# Altium PCB PCB1.PcbDoc
Units mm, origin at the board's own origin, x right, y up, seen from the top; angles counter-clockwise.
Board outline 152.4 x 101.6 mm, 2 copper layers (Top Layer, Bottom Layer); 44 components, 51 nets, 204 pads, 0 vias.
Unrouted connection lines stored in the file: 2.
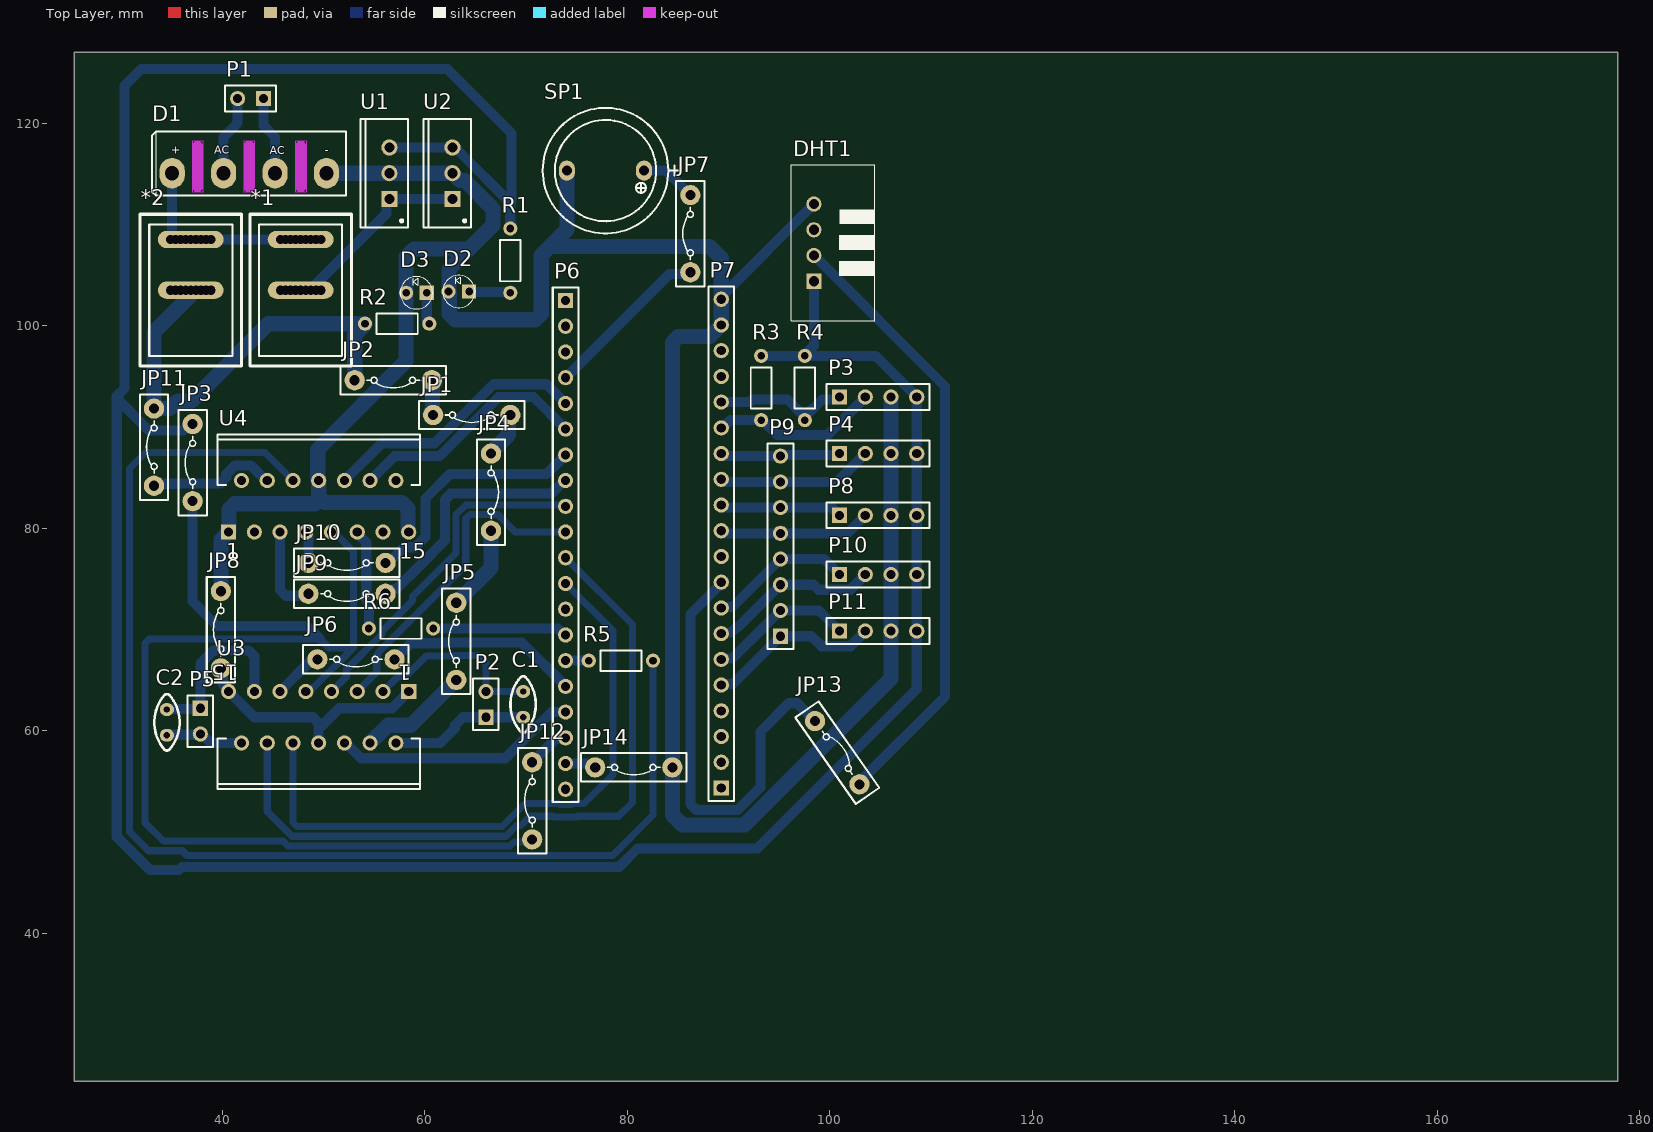
[diagram p0: Top Layer view]
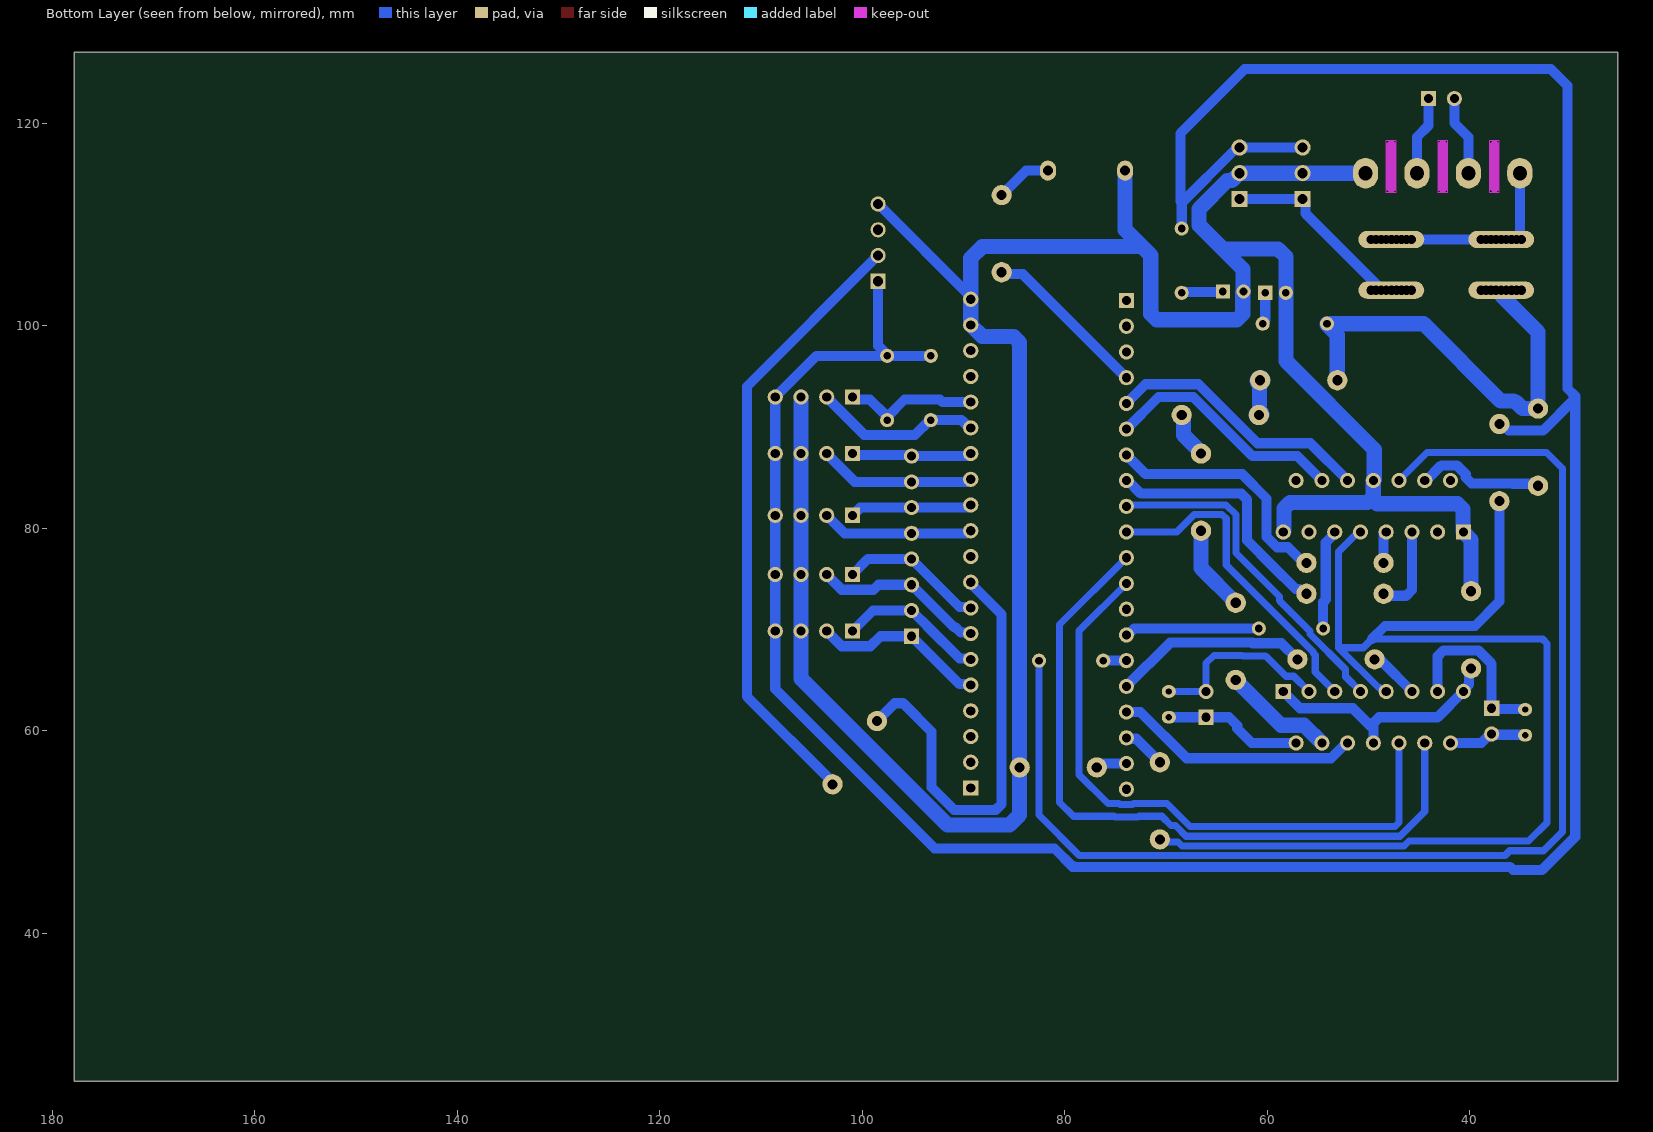
[diagram p1: Bottom Layer view, seen from below]
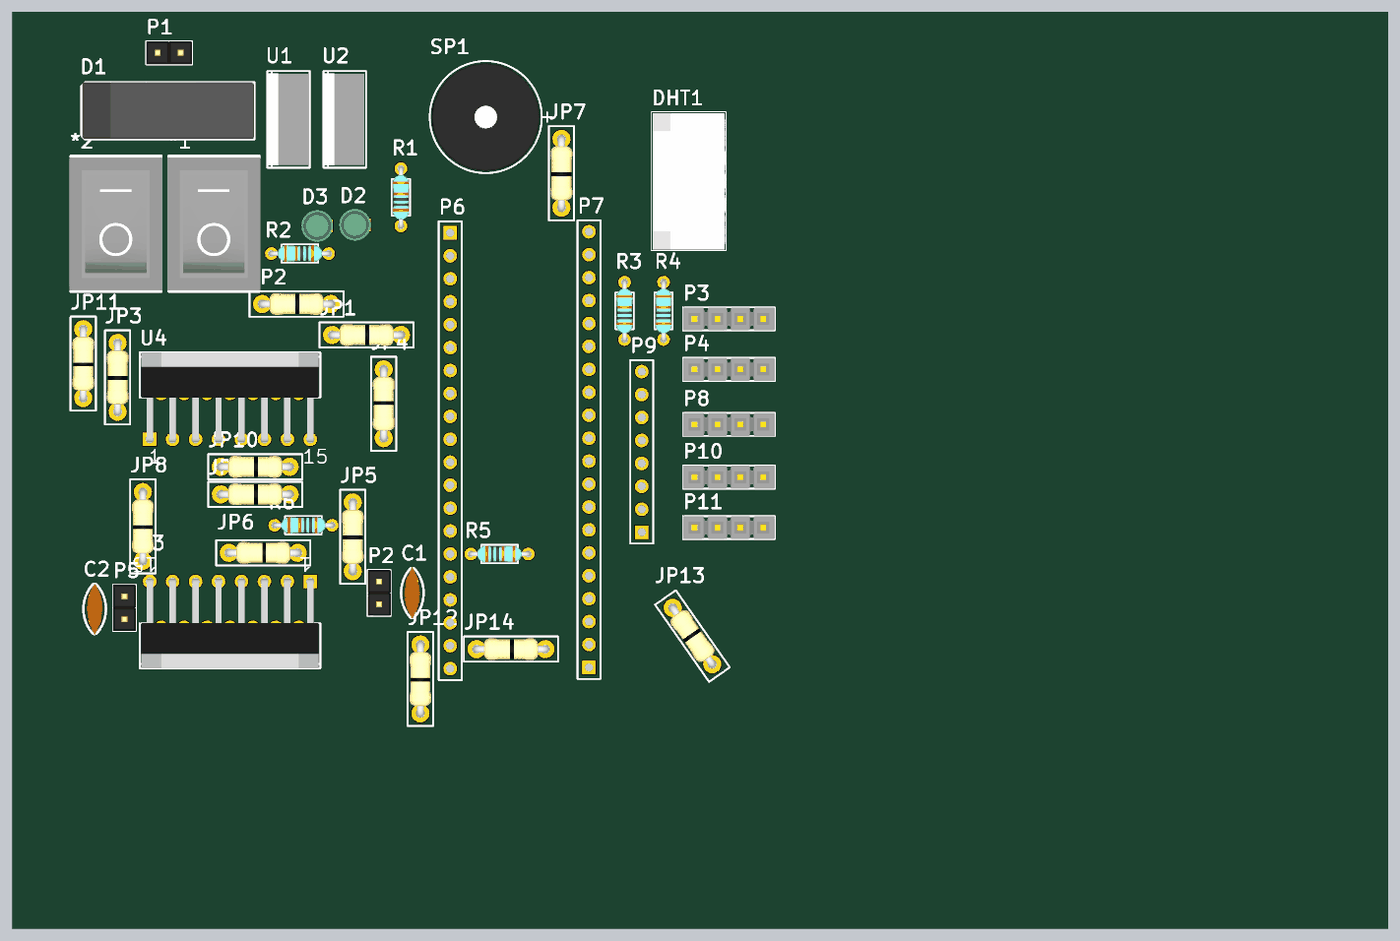
[diagram p2: 3D render of the assembled board from above, using the file's embedded part models]

## Layer stack, top to bottom
Top Solder: solder mask 0.0102, Solder Resist, Dk 3.5
Top Layer: signal copper 0.0356
Dielectric 1: dielectric 0.32, FR-4, Dk 4.8
Bottom Layer: signal copper 0.0356
Bottom Solder: solder mask 0.0102, Solder Resist, Dk 3.5

## Board outline
25.4,25.4 177.8,25.4 177.8,127 25.4,127

## Design rules (kind name [scope] priority, off if disabled: settings)
Clearance [All] p1: gap=0.254 ignorepadtopadclearanceinfootprint=FALSE except(0: Arc-Hole Track-Hole SMDPad-Hole THPad-Hole Via-Hole Fill-Hole Poly-Hole Region-Hole Text-Hole)
PolygonConnect [All] p1: connectstyle=Relief reliefconductorwidth=0.254 reliefentries=4 polygonreliefangle="90 Angle" airgapwidth=0.254
RoutingVias [All] p1: holewidth=0.711 width=1.27 viastyle="Through Hole" minholewidth=0.711 minwidth=1.27 maxholewidth=0.711 maxwidth=1.27
SolderMaskExpansion [All] p1: expansion=0.102 istentingtop=FALSE
Width [All] p1: maxlimit=5 minlimit=0.254 preferedwidth=1
30 further rules are at their usual default settings.

## Components (designator, comment, footprint, x,y, rotation, side; value= is the part's Value field where it differs from the comment)
*1 "Racker" "Racker 2 Pin" 47.752,103.508 r0 top
*2 "Racker" "Racker 2 Pin" 36.9,103.508 r0 top
C1 "100nF" Cap-100nF 69.723,62.611 r270 top
C2 "100nF" Cap-100nF 34.544,60.833 r90 top
D1 "Diode Bridge" "Bridge KBL PACKAGE" 42.68,115.062 r0 top
D2 "LED3MM" LED3mm_GRN 63.373,103.378 r180 top
D3 "LED3MM" LED3mm_GRN 59.182,103.251 r180 top
DHT1 "DHT22" DHT22 98.425,104.394 r90 top
JP1 "Jumper" Jumper 64.643,91.186 r180 top
JP2 "Jumper" Jumper 56.896,94.615 r180 top
JP3 "Jumper" Jumper 37.084,86.487 r90 top
JP4 "Jumper" Jumper 66.548,83.566 r270 top
JP5 "Jumper" Jumper 63.119,68.834 r90 top
JP6 "Jumper" Jumper 53.213,67.056 r180 top
JP7 "Jumper" Jumper 86.233,109.093 r90 top
JP8 "Jumper" Jumper 39.878,69.977 r90 top
JP9 "Jumper" Jumper 52.324,73.533 r180 top
JP10 "Jumper" Jumper 52.324,76.581 r180 top
JP11 "Jumper" Jumper 33.274,88.011 r90 top
JP12 "Jumper" Jumper 70.612,53.086 r90 top
JP13 "Jumper" Jumper 100.737,57.839 r305 top
JP14 "Jumper" Jumper 80.645,56.388 r180 top
P1 "Header 2" HDR1X2 44.069,122.428 r180 top
P2 "Header 2" HDR1X2 66.04,61.341 r90 top
P3 "Header 4" HDR1X4 100.965,92.964 r0 top
P4 "Header 4" HDR1X4 100.965,87.376 r0 top
P5 "Header 2" HDR1X2 37.846,62.23 r270 top
P6 "Header 20" HDR1X20 73.914,102.489 r270 top
P7 "Header 20" HDR1X20 89.281,54.356 r90 top
P8 "Header 4" HDR1X4 100.965,81.28 r0 top
P9 "Header 8" HDR1X8 95.123,69.342 r90 top
P10 "Header 4" HDR1X4 100.965,75.438 r0 top
P11 "Header 4" HDR1X4 100.965,69.85 r0 top
R1 "1K" RES-(1/4) 68.453,106.426 r90 top
R2 "1K" RES-(1/4) 57.277,100.203 r180 top
R3 "1K" RES-(1/4) 93.218,93.853 r90 top
R4 "1K" RES-(1/4) 97.536,93.853 r90 top
R5 "1K" RES-(1/4) 79.375,66.929 r0 top
R6 "1K" RES-(1/4) 57.658,70.104 r180 top
SP1 "" "BUZZER 7.62mm DC" 77.851,115.316 r180 top
U1 "L7805CV" "TO-220 AB" 56.515,115.062 r90 top
U2 "L7805CV" "TO-220 AB" 62.738,115.062 r90 top
U3 "L298N" Multiwatt15V 49.53,61.341 r180 top
U4 "L298N" Multiwatt15V 49.53,82.169 r0 top

## Footprints (in the part's own frame and the unit in brackets; to place one, negate y for a bottom-side part, rotate by r counter-clockwise, add the part's x,y. Pads: shape width x height; smd on the part's side, far side on the other; paste and mask are expansions set on the pad)
"Bridge KBL PACKAGE" [mm] "KBL Bridge Rectifiers DESIGNER :ABBAS BASEREH"
  oval 2.5x3 hole 1.4: 1(-7.62,0) 2(-2.54,0) 3(2.54,0) 4(7.62,0)
  Keep-Out Layer board cut-out: -5.6,3.2 -4.6,3.2 -4.6,-1.9 -5.6,-1.9
  Keep-Out Layer board cut-out: -0.5,3.2 0.5,3.2 0.5,-1.9 -0.5,-1.9
  Keep-Out Layer board cut-out: 4.6,3.2 5.6,3.2 5.6,-1.9 4.6,-1.9
  Keep-Out Layer lines w1: -5.1,-1.425 -5.1,2.725 ; 0,-1.425 0,2.725 ; 5.075,-1.425 5.075,2.725
  silkscreen extent -9.61,-2.22 9.56,4.13, body extent -9.51,-2.12 9.49,4.13, height 16.05
"BUZZER 7.62mm DC" [mm] "BUZZER 12mm DIA , 7.62mm pitch DESIGNER ABBAS BASEREH"
  oval 1.6x2 hole 1: 1(-3.81,0) 2(3.81,0)
  silkscreen extent -7.3,-6.2 6.2,6.2, body extent -6,-6 6,6, height 9.5
Cap-100nF [mil] "Bipolar Capacitor-Design:Ali Hafizi"
  oval 50x55 hole 25: 1(-50,0) 2(50,0)
  silkscreen extent -110,-49 110,49, body extent -115,-34 115,33, height 272
DHT22 [mm] "Temperature & Humidity Sensor"
  rect 1.5x1.5 hole 1: 1(0,0)
  round 1.5 hole 1: 2(2.54,0) 3(5.08,0) 4(7.62,0)
  silkscreen extent -3.88,-6.05 11.51,2.23, body extent -3.73,-5.91 11.37,2.1, height 29.1
HDR1X2 [mm] "Connector; Header; 2 Position"
  rect 1.5x1.5 hole 0.9: 1(0,0)
  round 1.5 hole 0.9: 2(2.54,0)
  silkscreen extent -1.27,-1.27 3.81,1.27, body extent -1.27,-1.28 3.81,1.26, height 8.79
HDR1X4 [mm] "Connector; Header; 4 Position"
  rect 1.5x1.5 hole 0.9: 1(0,0)
  round 1.5 hole 0.9: 2(2.54,0) 3(5.08,0) 4(7.62,0)
  silkscreen extent -1.27,-1.27 8.89,1.27, body extent -1.27,-1.28 8.89,1.26, height 8.38
HDR1X8 [mm] "Connector; Header; 8 Position"
  rect 1.5x1.5 hole 0.9: 1(0,0)
  round 1.5 hole 0.9: 2(2.54,0) 3(5.08,0) 4(7.62,0) 5(10.16,0) 6(12.7,0) 7(15.24,0) 8(17.78,0)
  silkscreen extent -1.27,-1.27 19.05,1.27
HDR1X20 [mm] "Connector; Header; 20 Position"
  rect 1.5x1.5 hole 0.9: 1(0,0)
  round 1.5 hole 0.9: 2(2.54,0) 3(5.08,0) 4(7.62,0) 5(10.16,0) 6(12.7,0) 7(15.24,0) 8(17.78,0) 9(20.32,0) 10(22.86,0) 11(25.4,0) 12(27.94,0) 13(30.48,0) 14(33.02,0) 15(35.56,0) 16(38.1,0) 17(40.64,0) 18(43.18,0) 19(45.72,0) 20(48.26,0)
  silkscreen extent -1.27,-1.27 49.53,1.27
Jumper [mm]
  round 2 hole 1: 1(-3.81,0) 2(3.81,0)
  silkscreen extent -5.21,-1.4 5.21,1.4, body extent -4.21,-1.2 4.21,1.2, height 2.5
LED3mm_GRN [mil]
  rect 55x55 hole 30: 1(-40,0)
  round 55 hole 30: 2(40,0)
  silkscreen extent -63,-63 63,63, body extent -69,-69 69,69, height 154
Multiwatt15V [mm] "TO, Thru-Hole, Vertical, Heatsink Mounted; 15 Bent Staggered Leads; Pitch 1.27 mm"
  rect 1.5x1.5 hole 0.9: 1(-8.89,-2.54)
  round 1.5 hole 0.9: 2(-7.62,2.54) 3(-6.35,-2.54) 4(-5.08,2.54) 5(-3.81,-2.54) 6(-2.54,2.54) 7(-1.27,-2.54) 8(0,2.54) 9(1.27,-2.54) 10(2.54,2.54) 11(3.81,-2.54) 12(5.08,2.54) 13(6.35,-2.54) 14(7.62,2.54) 15(8.89,-2.54)
  silkscreen extent -10,2.09 10,7.09, body extent -9.8,-2.81 9.8,7.08, height 21.3
"Racker 2 Pin" [mm] "(www.Smartw.ir)"
  oval 2.5x1.7 hole 0.9: 1(-2,5) 1(-1.5,5) 1(-1,5) 1(-0.5,5) 1(0,5) 1(0.5,5) 1(1,5) 1(1.5,5) 1(2,5) 2(-2,0) 2(-1.5,0) 2(-1,0) 2(-0.5,0) 2(0,0) 2(0.5,0) 2(1,0) 2(1.5,0) 2(2,0)
  silkscreen extent -5,-7.5 5,7.5, body extent -5.17,-7.38 5.13,7.32, height 12.62
RES-(1/4) [mil]
  round 55 hole 30: 1(-125,0) 2(125,0)
  silkscreen extent -80,-40 80,40, body extent -135,-36 135,36, height 115
"TO-220 AB" [mm] "Epoxy meets UL94, V0-Design:Abbas Basereh"
  rect 1.6x1.6 hole 1: 1(-2.54,0)
  round 1.6 hole 1: 2(0,0) 3(2.54,0)
  silkscreen extent -5.35,-1.85 5.35,2.85, body extent -5.08,-1.65 5.08,2.92, height 18.54

## Part data
C1 C2: library part "CAP CERAMIC TOTAL SIZE", "CAP Ceramic Total", Designer="Ali Hafizi"
D1: library part "Diode Bridge TOTAL SIZE", "Full Wave Diode Bridge", ComponentLink1Description=Datasheet, ComponentLink2Description=Reference, Design Date=1395/11/09, Designer="Abbas Basereh", Mounting Technology="Surface Mount\Through-Hole", Status=Unreleased
D2 D3: library part "LED 3MM", "Light Emitting Diode", Designer="Ali Hafizi"
DHT1: "Digital Humidity & Temprature Sensor"
P1 P2 P5: "Header, 2-Pin", LatestRevisionDate=17-Jul-2002, LatestRevisionNote="Re-released for DXP Platform.", Publisher="Altium Limited"
P3 P4 P8 P10 P11: "Header, 4-Pin", LatestRevisionDate=17-Jul-2002, LatestRevisionNote="Re-released for DXP Platform.", Publisher="Altium Limited"
P6 P7: "Header, 20-Pin", LatestRevisionDate=17-Jul-2002, LatestRevisionNote="Re-released for DXP Platform.", Publisher="Altium Limited"
P9: "Header, 8-Pin", LatestRevisionDate=17-Jul-2002, LatestRevisionNote="Re-released for DXP Platform.", Publisher="Altium Limited"
R1 R2 R3 R4 R5 R6: library part "RES DIP PACKAGE", "TOTAL DIP RESISTOR PACK", Designer="Ali Hafizi"
SP1: library part "PIEZO BUZZER", "PIEZO BUZZER ACTIVE", Comment_1="SPEAKER AND BEEP", ComponentLink2Description=Reference, Design Date=1395/11/14, Designer="Abbas Basereh", Mounting Technology=THD, PackageDescription=THD, Pin Count=2, Publisher="Abbas Basereh", Status=Unreleased
U1 U2: library part "L7805CV-Linear Voltage Regulator IC Positive 1 Output 5V 1.5A TO-220AB", "Linear Voltage Regulator IC Positive FIXED", Manufacturer=STMicroelectronics, Designer="Abbas Basereh", Link=https://www.aliexpress.com/item/, Part. No=L7805CV
U3 U4: "Dual Full Bridge Driver", Package Information="Latest Revision: Apr-1998", Package Reference=Multiwatt15H, Datasheet="Latest Revision: Jul-1999", Published=8-Jun-2000, Publisher="Altium Limited", Revision 1="24-Aug-2001: Footprint Added.", Revision 2="17-Jul-2002: Re-released for DXP Platform."
*1 *2: ComponentLink1Description="Website Smart World", ComponentLink1URL=https://www.smartw.ir/, ComponentLink2Description=Telegram, ComponentLink2URL=https://t.me/altium_smartw, ComponentLink3Description=Instagram, ComponentLink3URL=https://Instagram.com/smartgw.ir, DatasheetVersion=2021
JP1 JP2 JP3 JP4 JP5 JP6 JP7 JP8 JP9 JP10 JP11 JP12 JP13 JP14: Company=E.P.I.L, Defualt State=Close, Design Date=2011/11/02

## Nets (pads, with @x,y where several pads share a name; then routed paths per layer and width w, separated by ;. In a path a pad name is that pad's centre, name@x,y a point inside that pad or via, vN(x,y) a via of type N, cw(c..) or ccw(c..) an arc to the next point about the centre after c; other vN are vias at no path point)
+5: DHT1.1 JP3.1 JP3.2 JP12.1 P3.4 P4.4 P8.4 P10.4 P11.4 R1.2 R3.2 R4.2 U1.3 U2.3 U3.9 U4.9 | length 411.3
  Bottom Layer w0.7: U3.9 48.476,63.881 48.859,64.263 49.023,64.263 52.959,68.199 ; U4.9 50.953,79.476 51.173,79.476 52.959,77.69 52.959,68.199 ; JP12.1 70.363,49.027 68.808,49.027 68.418,48.638 46.488,48.638 46.016,49.11 34.202,49.11 32.385,50.927 32.385,68.639 32.795,69.049 49.678,69.049 50.528,68.199 52.959,68.199
  Bottom Layer w1: JP3.1 37.084,72.771 39.497,70.358 48.369,70.358 49.678,69.049 ; JP3.2 36.813,90.297 36.178,89.662 32.766,89.662 29.591,92.837 ; U1.3 U2.3 62.9,117.602 63.2,117.302 63.292,117.302 68.453,112.141 ; R1.2 68.453,112.141 ; R3.2 R4.2 ; DHT1.1 98.425,98.024 97.536,97.135 R4.2 ; 29.591,92.837 29.591,49.535 32.858,46.268 35.735,46.268 36.035,46.568 78.99,46.568 79.002,46.58 79.214,46.58 81.021,48.387 92.833,48.387 108.585,64.139 P11.4 P10.4 P8.4 P4.4 P3.4 104.521,97.028 R4.2 ; 29.591,92.837 29.591,93.042 30.353,93.804 30.353,123.698 32.004,125.349 62.23,125.349 68.58,118.999 68.58,112.268 68.453,112.141
+12: *2.2 JP2.2 JP11.2 R2.2 | length 43.8
  Bottom Layer w1.5: *2.2@37.4,103.508 37.19,103.508 36.866,103.185 36.866,102.974 33.274,99.381 JP11.2 34.798,91.821 35.433,92.456 35.56,92.456 35.687,92.583 36.957,92.583 44.577,100.203 R2.2 54.102,100.096 53.086,99.08 JP2.2
A.8_IN: P6.5 U4.10 | length 26.6
  Bottom Layer w1: U4.10 55.753,88.392 60.96,88.392 66.786,94.218 72.025,94.218 P6.5
A.9_IN: P6.6 U4.12 | length 24
  Bottom Layer w1: U4.12 57.039,87.138 61.479,87.138 67.305,92.964 70.739,92.964 P6.6
A.10_IN: JP10.1 P6.7 | length 24.4
  Bottom Layer w1: JP10.1 56.405,76.581 57.949,78.125 59.043,78.125 60.071,79.153 60.071,82.942 62.473,85.344 72.009,85.344 P6.7
A.11_IN: JP9.1 P6.8 | length 24.8
  Bottom Layer w1: JP9.1 56.405,73.533 56.874,74.002 57.201,74.002 59.457,76.259 61.992,78.793 61.992,82.832 62.577,83.418 72.488,83.418 73.779,84.709 P6.8
A.12_IN: P6.9 U3.7 | length 33.8
  Bottom Layer w0.7: U3.7 52.259,65.34 52.259,66.038 55.786,69.564 55.786,69.835 58.801,72.85 58.801,73.279 63.096,77.574 63.096,81.345 64.065,82.314 67.608,82.314 67.626,82.296 73.787,82.296 P6.9
A.15_IN: P6.10 U3.5 | length 32.3
  Bottom Layer w0.7: U3.5 55.269,65.81 55.269,67.487 55.419,67.637 55.419,67.727 64.05,76.358 64.05,80.95 64.46,81.36 67.212,81.36 68.943,79.629 P6.10
B.3_IN: P6.11 U3.12 | length 72.2
  Bottom Layer w0.7: U3.12 44.45,52.025 46.883,49.592 68.023,49.592 69.068,50.637 69.492,50.637 70.417,51.562 72.681,51.562 72.772,51.471 75.056,51.471 75.147,51.562 79.142,51.562 80.518,52.938 80.518,70.485 P6.11
B.4_IN: P6.12 U3.10 | length 62.7
  Bottom Layer w0.7: U3.10 46.99,50.956 47.4,50.546 67.628,50.546 69.898,52.816 73.2,52.816 73.291,52.725 74.537,52.725 74.628,52.816 75.744,52.816 78.613,55.685 78.613,69.85 P6.12
B.6_EN: P6.14 R6.1 | length 13.3
  Bottom Layer w1: R6.1 73.144,70.104 73.779,69.469 P6.14
B.7_EN: P6.15 R5.1 | length 2.4
  Bottom Layer w1: P6.15@73.977,66.865 P6.15 R5.1
B.8_EN: JP6.1 P6.16 | length 19.4
  Bottom Layer w1: JP6.1 58.618,68.651 61.435,68.651 61.49,68.707 69.596,68.707 P6.16
B.9_EN: P6.17 U3.6 | length 24.4
  Bottom Layer w1: U3.6 52.205,58.801 53.709,57.297 67.965,57.297 72.517,61.849 P6.17
GND: D1.4 D2.2 D3.2 DHT1.4 JP8.1 JP8.2 JP14.1 P3.3 P4.3 P7.19 P7.20 P8.3 P10.3 P11.3 SP1.2 U1.2 U2.2 U3.1 U3.8 U3.15 U4.1 U4.8 U4.15 | length 288.4
  Bottom Layer w1: JP8.1 40.069,65.976 40.069,64.587 40.64,64.016 U3.15 43.18,61.341 48.944,61.341 49.53,60.755 49.53,60.413 ; U3.8 49.53,60.413 ; U3.1 56.769,62.23 51.562,62.23 49.745,60.413 49.53,60.413 ; P7.20 89.377,102.712 89.377,102.966 DHT1.4
  Bottom Layer w1.5: JP8.2 39.878,78.867 U4.1 40.682,79.671 40.682,81.879 41.226,82.423 49.149,82.423 49.53,82.804 U4.8 49.434,84.805 49.434,87.788 58.166,96.52 58.166,106.807 58.928,107.569 64.389,107.569 ; 49.696,82.97 50.116,82.55 57.763,82.55 58.349,81.964 58.349,79.7 U4.15 ; D1.4 U1.2 62.765,115.062 63.501,114.326 63.954,114.326 66.75,111.529 66.75,109.93 64.389,107.569 ; SP1.2 74.041,109.484 72.38,107.823 ; P3.3 P4.3 P8.3 P10.3 P11.3 106.045,65.151 91.587,50.693 85.441,50.693 84.455,51.679 JP14.1 84.455,98.347 85.041,98.933 88.138,98.933 P7.19 P7.20 89.281,106.68 88.138,107.823 72.38,107.823 ; 64.389,107.569 62.396,105.576 62.396,103.417 D2.2 62.433,103.302 62.433,101.17 63.019,100.584 70.915,100.584 71.501,101.17 71.501,106.944 72.38,107.823
Net*1_1: *1.1 *2.1 D1.1 | length 20
  Bottom Layer w1: D1.1@35.347,114.775 D1.1 35.06,108.831 35.383,108.508 35.4,108.508 35.9,108.508 36.4,108.508 36.9,108.508 37.4,108.508 37.9,108.508 38.4,108.508 38.9,108.508 45.752,108.508 46.252,108.508 46.752,108.508 47.252,108.508 47.752,108.508 *1.1@48.252,108.508
Net*1_2: *1.2 U1.1 U2.1 | length 19.4
  Bottom Layer w1: *1.2@47.752,103.508 48.252,103.508 48.652,103.508 56.215,111.071 56.215,112.222 U1.1 U2.1
NetC1_1: C1.1 P2.2 U3.3 | length 18.4
  Bottom Layer w0.7: U3.3 57.384,65.385 58.146,65.385 60.158,67.397 62.456,67.397 62.512,67.453 65.278,67.453 66.04,66.691 P2.2 C1.1
NetC1_2: C1.2 P2.1 U3.2 | length 13.8
  Bottom Layer w1: U3.2 61.536,58.801 62.968,60.233 62.968,60.519 63.79,61.341 P2.1 C1.2
NetC2_1: C2.1 P5.2 U3.14 | length 7.8
  Bottom Layer w1: C2.1 34.596,59.615 37.771,59.615 P5.2 37.981,59.69 38.87,58.801 U3.14
NetC2_2: C2.2 P5.1 U3.13 | length 17.3
  Bottom Layer w1: C2.2 34.596,62.155 37.771,62.155 P5.1 37.846,66.616 39.175,67.945 42.594,67.945 43.18,67.359 U3.13
NetD1_2: D1.2 P1.2 | length 7.9
  Bottom Layer w1: D1.2 40.14,118.626 41.529,120.015 P1.2
NetD1_3: D1.3 P1.1 | length 8.1
  Bottom Layer w1: P1.1 44.069,119.792 45.22,118.641 D1.3 D1.3@45.026,115.256
NetD2_1: D2.1 R1.1 | length 4.1
  Bottom Layer w1: D2.1 64.453,103.314 68.389,103.314 R1.1
NetD3_1: D3.1 R2.1 | length 3.2
  Bottom Layer w1: D3.1 60.198,100.564 60.452,100.31 R2.1
NetDHT1_2: DHT1.2 JP13.2 | length 61.1
  Bottom Layer w1: DHT1.2 98.451,106.934 111.379,94.006 111.379,63.373 102.923,54.917 JP13.2
NetJP1_1: JP1.1 JP4.1 | length 4.6
  Bottom Layer w1.5: JP4.1 66.548,87.484 68.262,89.198 68.262,90.995 JP1.1
NetJP1_2: JP1.2 JP2.1 | length 3.5
  Bottom Layer w1.5: JP1.2@60.769,91.249 JP2.1@60.769,94.551
  Bottom Layer w2: JP2.1 JP2.1@60.769,94.551 ; JP1.2@60.769,91.249 JP1.2
NetJP4_2: JP4.2 JP5.2 | length 8.5
  Bottom Layer w1.5: JP5.2 66.548,76.073 JP4.2
NetJP5_1: JP5.1 U3.4 | length 11.1
  Bottom Layer w1.5: U3.4 56.364,60.555 58.65,60.555 JP5.1
NetJP6_2: JP6.2 U3.11 | length 5
  Bottom Layer w1: U3.11 48.704,66.865 49.212,66.865 JP6.2
NetJP7_1: JP7.1 P6.4 | length 16.6
  Bottom Layer w1: P6.4 84.137,105.092 86.042,105.092 JP7.1
NetJP7_2: JP7.2 SP1.1 | length 5.6
  Bottom Layer w1: SP1.1 83.82,115.316 JP7.2
NetJP9_2: JP9.2 U4.5 | length 9.1
  Bottom Layer w1: U4.5 45.72,73.914 46.291,73.343 48.324,73.343 JP9.2 JP9.2@48.323,73.724
NetJP10_2: JP10.2 U4.7 | length 3.7
  Bottom Layer w1: U4.7@48.164,79.533 U4.7 48.514,79.629 JP10.2 JP10.2@48.672,76.739
NetJP11_1: JP11.1 U4.4 | length 12.8
  Bottom Layer w1: JP11.1 33.465,84.392 35.754,84.392 35.793,84.431 39.82,84.431 40.406,85.017 40.406,85.332 41.287,86.213 42.811,86.213 44.315,84.709 U4.4
NetJP12_2: JP12.2 P6.18 | length 4.3
  Bottom Layer w1: JP12.2 72.929,59.213 73.818,59.213 P6.18
NetJP13_1: JP13.1 P7.9 | length 44
  Bottom Layer w1: P7.9 89.281,74.541 86.233,71.493 86.233,52.783 86.819,52.197 90.932,52.197 93.15,54.415 93.15,59.922 95.956,62.728 96.784,62.728 JP13.1
NetJP14_2: JP14.2 P6.19 | length 3.1
  Bottom Layer w1: P6.19 76.183,56.769 76.564,56.388 JP14.2
NetP3_1: P3.1 P7.16 R4.1 | length 13.4
  Bottom Layer w1: P7.16 92.079,92.456 92.333,92.71 95.825,92.71 97.46,91.075 97.46,90.754 R4.1 ; R4.1@97.735,91.197 99.251,92.714 100.715,92.714 P3.1
NetP3_2: P3.2 P7.15 R3.1 | length 16.7
  Bottom Layer w1: P7.15 89.416,89.916 90.178,90.678 R3.1 93.325,90.678 94.778,89.225 99.793,89.225 103.505,92.938 P3.2
NetP4_1: P4.1 P7.14 P9.8 | length 12
  Bottom Layer w1: P7.14@89.377,87.472 P7.14 89.416,87.376 89.67,87.122 P9.8 95.219,87.218 100.807,87.218 P4.1
NetP4_2: P4.2 P7.13 P9.7 | length 15.5
  Bottom Layer w1: P7.13 89.416,84.836 89.67,84.582 P9.7 100.737,84.582 103.505,87.35 P4.2
NetP7_5: P7.5 P9.1 P11.2 | length 17.3
  Bottom Layer w1: P7.5 89.377,64.612 90.393,64.612 P9.1 98.202,69.342 99.198,68.346 102.027,68.346 103.505,69.824 P11.2
NetP7_6: P7.6 P9.2 P11.1 | length 14.5
  Bottom Layer w1: P7.6 89.364,67.139 90.38,67.139 93.619,70.378 93.619,70.404 94.061,70.846 94.087,70.846 P9.2 98.933,71.882 P11.1
NetP7_7: P7.7 P9.3 P10.2 | length 17.1
  Bottom Layer w1: P7.7 89.377,69.692 90.251,69.692 90.761,70.201 90.902,70.201 P9.3 98.399,74.422 98.887,73.934 102.027,73.934 103.505,75.412 P10.2
NetP7_8: P7.8 P9.4 P10.1 | length 14.3
  Bottom Layer w1: P7.8 89.377,72.232 90.393,72.232 P9.4 99.441,76.962 P10.1
NetP7_11: P7.11 P8.2 P9.5 | length 15.1
  Bottom Layer w1: P7.11 89.416,79.756 89.67,79.502 P9.5 101.753,79.502 103.505,81.254 P8.2
NetP7_12: P7.12 P8.1 P9.6 | length 12.1
  Bottom Layer w1: P7.12 89.416,82.296 89.67,82.042 P9.6 100.203,82.042 P8.1
NetR5_2: R5.2 U4.6 | length 123.4
  Bottom Layer w0.7: U4.6 44.232,87.467 32.427,87.467 30.861,85.901 30.861,50.038 32.743,48.156 36.062,48.156 36.546,47.672 78.533,47.672 82.55,51.689 R5.2
NetR6_2: R6.2 U4.11 | length 10
  Bottom Layer w1: U4.11 53.34,79.494 54.229,78.605 54.229,72.957 54.483,72.703 R6.2
pads on no net: DHT1.3 P6.1 P6.2 P6.3 P6.13 P6.20 P7.1 P7.2 P7.3 P7.4 P7.10 P7.17 P7.18 U4.2 U4.3 U4.13 U4.14

## Text inside footprints (layer, text, board x,y; h text height)
D1: Top Overlay "+" at 34.955,116.987 h0.8; Top Overlay "-" at 50.155,116.987 h0.8; Top Overlay "AC" at 44.68,116.937 h0.8; Top Overlay "AC" at 39.23,116.987 h0.8
U3: Top Overlay "15" at 41.59,66.506 h1.5 r180; Top Overlay "1" at 58.65,66.506 h1.5 r180
U4: Top Overlay "1" at 40.41,77.004 h1.5; Top Overlay "15" at 57.47,77.004 h1.5